# EAGLE board xambi (EAGLE 7.0.0)
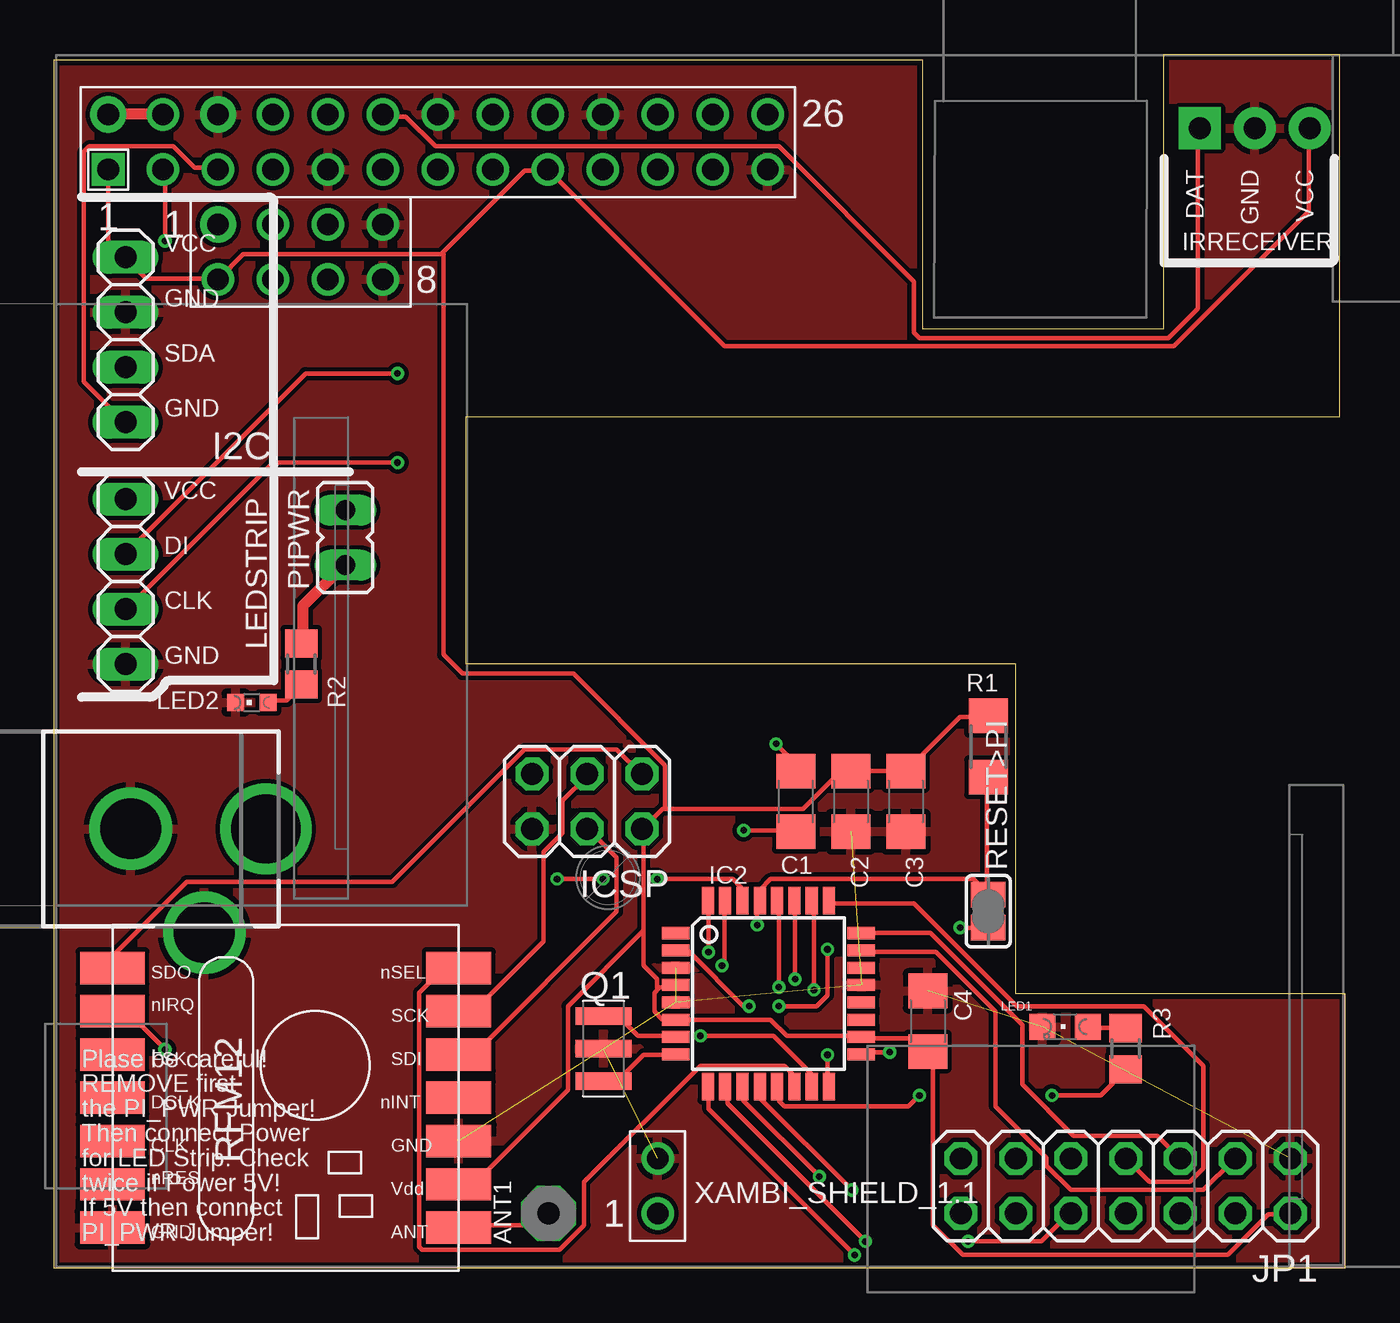
[diagram p0: board, top side]
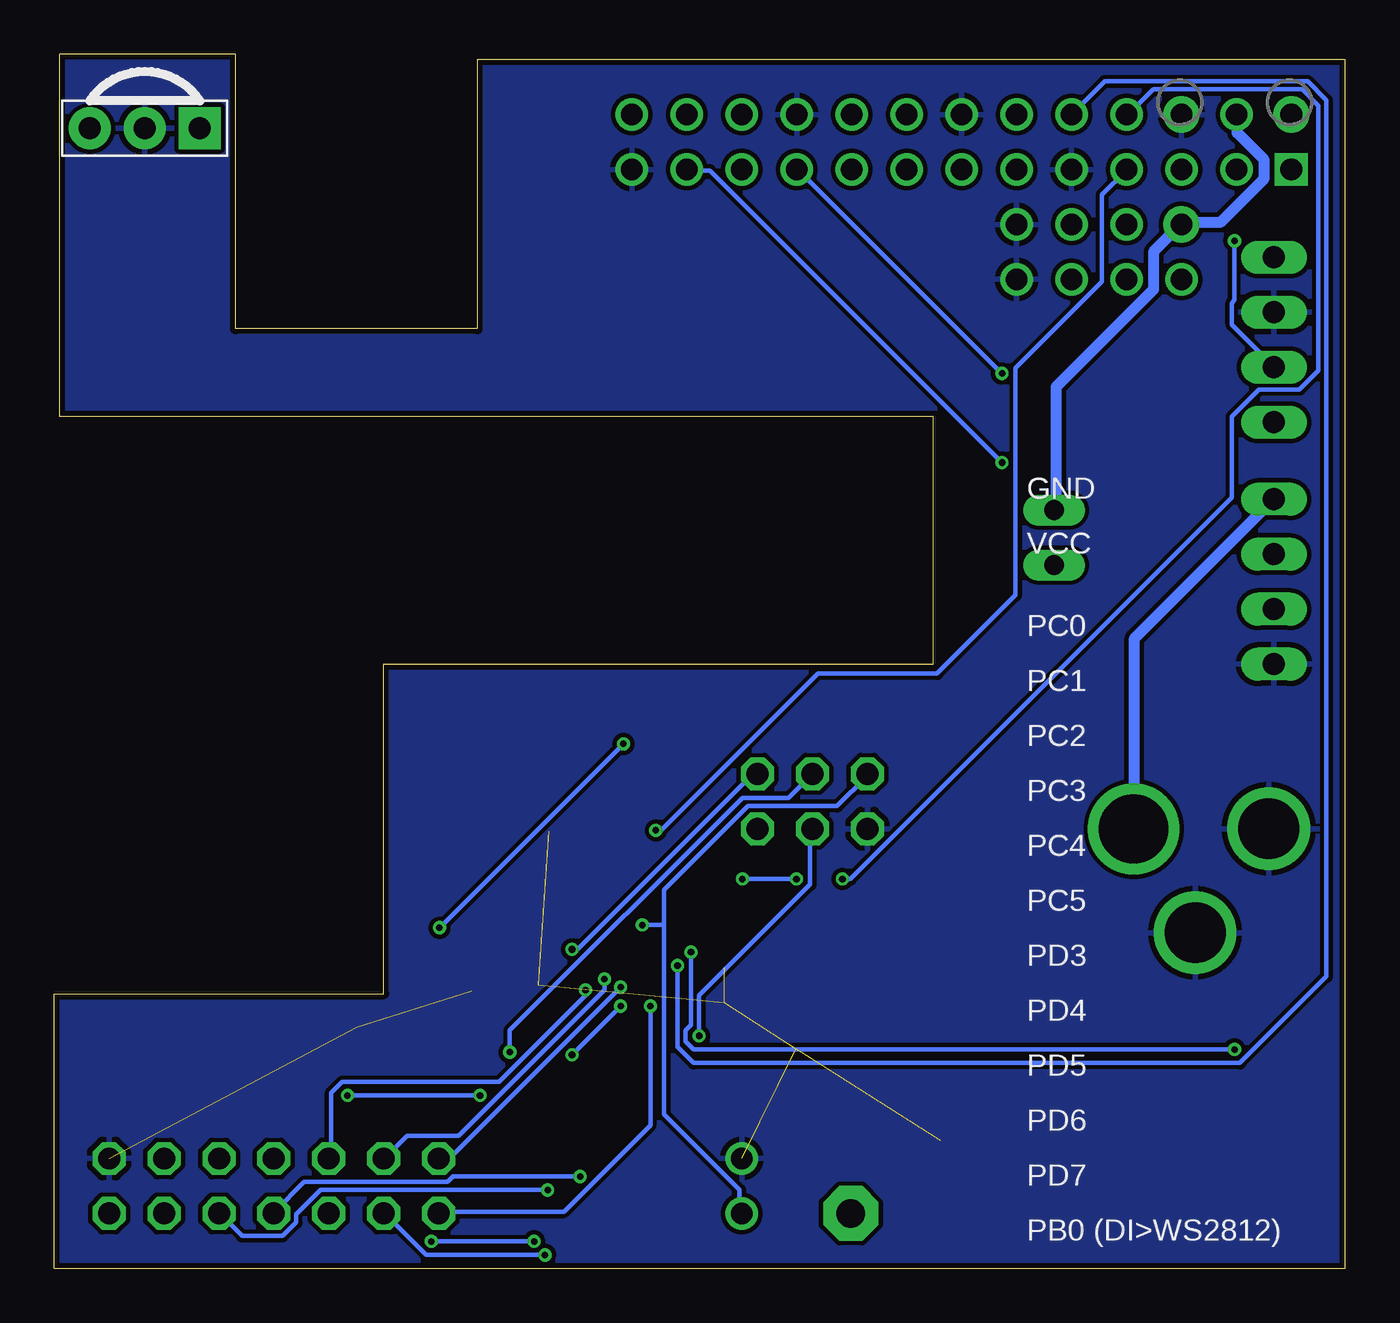
[diagram p1: board, bottom side, seen from below]

Size 59.69 x 56.13 mm. Coordinates in mm from the lower left corner, seen from the top.
Outline: 0,0 0,55.88 40.13,55.88 40.13,43.43 51.31,43.43 51.31,56.13 59.44,56.13 59.44,39.37 19.05,39.37 19.05,27.94 44.45,27.94 44.45,12.7 59.69,12.7 59.69,0 0,0
Copper layers (1*16): Top 0.035mm / dielectric 1.5mm / Bottom 0.035mm
Design rules "ITEADstudio_DRC": minimum track width 6mil, minimum drill 12mil, track to track 6mil, track to pad 6mil, pad to pad 6mil, via to via 6mil, smd to smd 0mil, copper to edge 10mil, drill to drill 10mil, minimum pad ring 10mil, minimum via ring 6mil, stop-mask expansion 2mil, vias tented up to drill 100mil, thermal gap 10mil
Net classes: 0 default: width 0.203 mm, drill 0.254 mm, clearance 0.152 mm; 1 power: width 0.508 mm, drill 0.305 mm, clearance 0.203 mm

## Footprints (pad centres in the part's own frame; a part is rotated, then mirrored left to right if it is on the bottom)
PAD-01 = drill 1.321 pad 2.54 octagon: 1 0,0
C1206 = smd 1.6 x 1.8: 1 -1.4,0; 2 1.4,0
DCJACK_2MM_PTH = drill 2.8: GND 0,7.35; GNDBREAK 4.8,10.75 | drill 3.2: PWR 0,13.6
1X04 = drill 1.016 long: 1 -3.81,0; 2 -1.27,0; 3 1.27,0; 4 3.81,0
TQFP32-08 = smd 1.27 x 0.559: 1 -4.293,2.8; 2 -4.293,2; 3 -4.293,1.2; 4 -4.293,0.4; 5 -4.293,-0.4; 6 -4.293,-1.2; 7 -4.293,-2; 8 -4.293,-2.8; 17 4.293,-2.8; 18 4.293,-2; 19 4.293,-1.2; 20 4.293,-0.4; 21 4.293,0.4; 22 4.293,1.2; 23 4.293,2; 24 4.293,2.8 | smd 0.559 x 1.27: 9 -2.8,-4.293; 10 -2,-4.293; 11 -1.2,-4.293; 12 -0.4,-4.293; 13 0.4,-4.293; 14 1.2,-4.293; 15 2,-4.293; 16 2.8,-4.293; 25 2.8,4.293; 26 2,4.293; 27 1.2,4.293; 28 0.4,4.293; 29 -0.4,4.293; 30 -1.2,4.293; 31 -2,4.293; 32 -2.8,4.293
2X03 = drill 1.016 octagon: 1 -2.54,-1.27; 2 -2.54,1.27; 3 0,-1.27; 4 0,1.27; 5 2.54,-1.27; 6 2.54,1.27
PNA460XM = drill 1.016 pad 1.93 square: 1 -2.54,0 | drill 1.016 pad 1.93: 2 0,0; 3 2.54,0
2X07 = drill 1.016 octagon: 1 -7.62,-1.27; 2 -7.62,1.27; 3 -5.08,-1.27; 4 -5.08,1.27; 5 -2.54,-1.27; 6 -2.54,1.27; 7 0,-1.27; 8 0,1.27; 9 2.54,-1.27; 10 2.54,1.27; 11 5.08,-1.27; 12 5.08,1.27; 13 7.62,-1.27; 14 7.62,1.27
CHIPLED_0805 = smd 1.2 x 1.2: A 0,-1.05; C 0,1.05
CHIPLED_0603 = smd 0.8 x 0.8: A 0,-0.75; C 0,0.75
JP1 = drill 0.914 long: 1 0,-1.27; 2 0,1.27
CSTCR6M = smd 0.8 x 2.6: 1 -1.5,0; 2 0,0; 3 1.5,0
R1206 = smd 1.6 x 1.803: 1 -1.422,0; 2 1.422,0
R0805 = smd 1.3 x 1.5: 1 -0.95,0; 2 0.95,0
SJ = smd 1.168 x 1.6: 1 -0.762,0; 2 0.762,0
RFM12 = smd 1.5 x 3: 1 -5,-10; 2 -3,-10; 3 -1,-10; 4 1,-10; 5 3,-10; 6 5,-10; 7 7,-10; 8 7,6; 9 5,6; 10 3,6; 11 1,6; 12 -1,6; 13 -3,6; 14 -5,6
RPI-B-V2 = drill 1 square: P1_1 0,0 | drill 1 pad 1.676: P1_2 0,2.54; P1_6 5.08,2.54; P5_1 5.08,-2.54 | drill 1: P1_3 2.54,0; P1_4 2.54,2.54; P1_5 5.08,0; P1_7 7.62,0; P1_8 7.62,2.54; P1_9 10.16,0; P1_10 10.16,2.54; P1_11 12.7,0; P1_12 12.7,2.54; P1_13 15.24,0; P1_14 15.24,2.54; P1_15 17.78,0; P1_16 17.78,2.54; P1_17 20.32,0; P1_18 20.32,2.54; P1_19 22.86,0; P1_20 22.86,2.54; P1_21 25.4,0; P1_22 25.4,2.54; P1_23 27.94,0; P1_24 27.94,2.54; P1_25 30.48,0; P1_26 30.48,2.54; P5_2 5.08,-5.08; P5_3 7.62,-2.54; P5_4 7.62,-5.08; P5_5 10.16,-2.54; P5_6 10.16,-5.08; P5_7 12.7,-2.54; P5_8 12.7,-5.08; P6_1 25.4,-48.26; P6_2 25.4,-45.72

## Placement (x,y rotation side)
ANT1  [PAD-01]  22.86,2.54 0 top
C1  100n  [C1206]  34.29,21.59 90 top
C2  100n  [C1206]  36.83,21.59 270 top
C3  4.7ÂµF  [C1206]  39.37,21.59 270 top
C4  4,7ÂµF  [C1206]  40.39,11.43 270 top
CN1  LEDPower 5v/12V  [DCJACK_2MM_PTH]  -3.81,20.32 270 top
I2C  [1X04]  3.3,42.93 90 top
IC2  MEGA368  [TQFP32-08]  33.02,12.7 0 top
ICSP  [2X03]  24.64,21.59 180 top
IRRECEIVER  PNA460XM  [PNA460XM]  55.5,52.7 180 bottom
JP1  [2X07]  49.53,3.81 180 top
LED1  PB1  [CHIPLED_0805]  46.74,11.18 90 top
LED2  red  [CHIPLED_0603]  9.14,26.16 90 top
LEDSTRIP  [1X04]  3.3,31.75 270 top
PIPWR  [JP1]  13.46,33.78 180 top
Q1  16MHz  [CSTCR6M]  25.4,10.16 270 top
R1  10k  [R1206]  43.18,24.13 90 top
R2  680R  [R0805]  11.43,27.94 90 top
R3  680  [R0805]  49.53,10.16 270 top
RESET>PI  [SJ]  43.18,16.51 90 top
U$1  RFM12_SMDSMD  [RFM12]  12.7,8.89 270 top
XAMBI_SHIELD_1.1  XPIX Development / 2014  [RPI-B-V2]  2.5,50.8 0 top

## Library data of the parts
ANT1 = discrete
C1-C4 R1-R3 = rcl
CN1 IRRECEIVER LED1 LED2 = _adafruit
I2C ICSP JP1 LEDSTRIP = pinhead
IC2 = avr-7
PIPWR RESET>PI = jumper
Q1 = murata-filter; MPN: CSTCR6M00G53-R0; OC_FARNELL: 1170434; OC_NEWARK: 25M8759
U$1 = rfm_12
XAMBI_SHIELD_1.1 = raspberry

## Nets
+3V3: C2.1 C3.1 C4.2 I2C.4 IC2.4 IC2.6 IC2.18 ICSP.2 IRRECEIVER.3 JP1.2 R1.2 U$1.9 XAMBI_SHIELD_1.1.P1_1 XAMBI_SHIELD_1.1.P1_17 XAMBI_SHIELD_1.1.P5_2
+5V [power]: PIPWR.2 R2.2
+12V [power]: CN1.PWR LEDSTRIP.1
_RESET: C1.1 XAMBI_SHIELD_1.1.P1_7
ANTENNA: ANT1.1 U$1.8
CLK: LEDSTRIP.3 XAMBI_SHIELD_1.1.P1_23
DI: LEDSTRIP.2 XAMBI_SHIELD_1.1.P1_19
GND [power]: C2.2 C3.2 C4.1 CN1.GND CN1.GNDBREAK I2C.3 IC2.3 IC2.5 IC2.21 ICSP.6 IRRECEIVER.2 JP1.1 LED1.C LED2.C LEDSTRIP.4 Q1.2 U$1.7 U$1.10 XAMBI_SHIELD_1.1.P1_6 XAMBI_SHIELD_1.1.P1_9 XAMBI_SHIELD_1.1.P1_14 XAMBI_SHIELD_1.1.P1_20 XAMBI_SHIELD_1.1.P1_25 XAMBI_SHIELD_1.1.P5_7 XAMBI_SHIELD_1.1.P5_8 XAMBI_SHIELD_1.1.P6_2
GPIO30: XAMBI_SHIELD_1.1.P5_5
GPIO31: XAMBI_SHIELD_1.1.P5_6
I2C0_SCL/GPIO29: XAMBI_SHIELD_1.1.P5_4
I2C0_SDA/GPIO28: XAMBI_SHIELD_1.1.P5_3
IRINPUT: IRRECEIVER.1 XAMBI_SHIELD_1.1.P1_12
IRQ: IC2.32 U$1.2
MISO: IC2.16 ICSP.1 U$1.1
MOSI: IC2.15 ICSP.4 U$1.12
N$1: C1.2 RESET>PI.1
N$2: IC2.7 Q1.1
N$3 [power]: PIPWR.1 XAMBI_SHIELD_1.1.P1_2 XAMBI_SHIELD_1.1.P1_4 XAMBI_SHIELD_1.1.P5_1
N$4: IC2.8 Q1.3
N$7: LED2.A R2.1
N$19: LED1.A R3.1
N$20: IC2.13 R3.2
PB0: IC2.12 JP1.6
PC0: IC2.23 JP1.3
PC1: IC2.24 JP1.5
PC2: IC2.25 JP1.7
PC3: IC2.26 JP1.9
PC4: IC2.27 JP1.11
PC5: IC2.28 JP1.13
PD3: IC2.1
PD4: IC2.2 JP1.14
PD5: IC2.9 JP1.12
PD6: IC2.10 JP1.10
PD7: IC2.11 JP1.8
RESET: IC2.29 ICSP.5 R1.1 RESET>PI.2 XAMBI_SHIELD_1.1.P6_1
RX: IC2.30 XAMBI_SHIELD_1.1.P1_8
SCK: IC2.17 ICSP.3 U$1.13
SCL: I2C.1 XAMBI_SHIELD_1.1.P1_5
SDA: I2C.2 XAMBI_SHIELD_1.1.P1_3
SEL: IC2.14 U$1.14
TX: IC2.31 XAMBI_SHIELD_1.1.P1_10

## Tracks (layer width: path | path; a pad name or v marks a point on that pad's centre or on a via)
+3V3
  Top 0.203: R1.2 43.12,25.5 41.88,25.5 C3.1 39.25,23 36.88,23 C2.1 36.75,22.88 36.25,22.88 34.62,21.25 28.25,21.25 | 27.94,12.94 28,13 28.62,13 IC2.4 | 27.94,12.94 27.75,12.75 27.75,11.88 28.12,11.5 IC2.6 33.12,11.5 33.88,10.75 37.25,10.75 IC2.18 37.38,10.62 39.88,10.62 40.38,10.12 C4.2 40.5,10 40.62,9.88 40.62,2 42,0.62 54.25,0.62 56.12,2.5 57.12,2.5 JP1.2 | 27.25,15.62 27.25,20.25 ICSP.2 27.25,20.38 28.12,21.25 28.25,21.25 | 27.25,15.62 27.25,14 27.88,13.38 27.88,13 27.94,12.94 | 27.25,15.62 23.75,12.12 23.75,8.25 19.5,4 18.75,4 U$1.9 | 22.88,50.88 XAMBI_SHIELD_1.1.P1_17 | 2.5,50.88 XAMBI_SHIELD_1.1.P1_1 2.5,47.5 3.25,46.75 I2C.4 3.38,46.62 4.25,45.75 7.5,45.75 XAMBI_SHIELD_1.1.P5_2 7.62,45.75 8.75,46.88 17.88,46.88 17.94,46.94 | 17.94,46.94 21.75,50.75 22.75,50.75 XAMBI_SHIELD_1.1.P1_17 | IRRECEIVER.3 58,52.62 58,48.88 51.75,42.62 31,42.62 22.88,50.75 XAMBI_SHIELD_1.1.P1_17 | 28.25,21.25 28.25,23.25 24,27.5 18.88,27.5 18,28.38 18,46.88 17.94,46.94
+5V
  Top 0.508: R2.2 11.5,29 11.5,30.62 13.38,32.5 PIPWR.2
+12V
  Bottom 0.508: LEDSTRIP.1 3.38,35.5 9.75,29.12 9.75,20.38 CN1.PWR
_RESET  (via drill 0.3)
  Top 0.203: v31.88,20.25 34.25,20.25 C1.1
  Bottom 0.203: v31.88,20.25 31.62,20.25 24.38,27.5 18.88,27.5 15.25,31.12 15.25,41.62 11.25,45.62 11.25,49.62 10.12,50.75 XAMBI_SHIELD_1.1.P1_7
ANTENNA
  Top 0.203: U$1.8 18.75,2 22.25,2 22.75,2.5 ANT1.1
CLK  (via drill 0.3)
  Top 0.203: v15.88,37.25 10.12,37.25 3.38,30.5 LEDSTRIP.3
  Bottom 0.203: v15.88,37.25 29.38,50.75 30.38,50.75 XAMBI_SHIELD_1.1.P1_23
DI  (via drill 0.3)
  Top 0.203: v15.88,41.38 11.62,41.38 3.38,33.12 LEDSTRIP.2
  Bottom 0.203: v15.88,41.38 25.25,50.75 XAMBI_SHIELD_1.1.P1_19
GND  (8 unrouted)
  pour Top: 0,0 0,55.88 59.69,55.88 59.69,0
  pour Bottom: 0,0 0,55.88 59.69,55.88 59.69,0
IRINPUT
  Top 0.203: XAMBI_SHIELD_1.1.P1_12 15.25,53.25 16.25,53.25 17.62,51.88 33.5,51.88 39.75,45.62 39.75,43.25 40,43 51.5,43 52.88,44.38 52.88,52.62 IRRECEIVER.1
IRQ  (via drill 0.3)
  Top 0.203: v30.25,14.62 30.25,16.88 IC2.32 | v5.12,10.12 3.38,11.88 2.75,11.88 U$1.2
  Bottom 0.203: v30.25,14.62 30.25,11.25 30.5,11 30.5,10.5 30.12,10.12 v5.12,10.12
MISO  (via drill 0.3)
  Top 0.203: v35.75,9.88 35.75,8.5 IC2.16 | v33.5,12.12 35.25,12.12 35.75,12.62 v35.75,14.75 | U$1.1 2.75,14 2.75,14.5 6.12,17.88 15.62,17.88 21.75,24 26,24 27.12,22.88 ICSP.1
  Bottom 0.203: v33.5,12.12 v35.75,9.88 | v35.75,14.75 35.5,14.75 27.5,22.75 27.25,22.75 ICSP.1
MOSI  (via drill 0.3)
  Top 0.203: v29.88,10.75 33.25,10.75 35,9 35,8.5 IC2.15 | U$1.12 18.75,10 19.5,10 26,16.5 26,19 24.75,20.25 ICSP.4
  Bottom 0.203: v29.88,10.75 29.88,12.62 24.75,17.75 24.75,20.25 ICSP.4
N$1  (via drill 0.3)
  Top 0.203: v41.88,15.75 43.12,15.75 RESET>PI.1 | v33.38,24.25 34.38,23.25 34.38,23 C1.2
  Bottom 0.203: v33.38,24.25 v41.88,15.75
N$2
  Top 0.203: IC2.7 28.62,10.75 27,10.75 26.12,11.62 25.5,11.62 Q1.1
N$3
  Top 0.508: XAMBI_SHIELD_1.1.P1_4 5,53.38 2.5,53.38 XAMBI_SHIELD_1.1.P1_2
  Bottom 0.508: PIPWR.1 13.38,35.12 13.38,40.75 8.88,45.25 8.88,47 7.62,48.25 XAMBI_SHIELD_1.1.P5_1 7.38,48.38 5.75,48.38 3.75,50.38 3.75,51.25 5,52.5 5,53.25 XAMBI_SHIELD_1.1.P1_4
N$4
  Top 0.203: IC2.8 28.62,9.88 27.25,9.88 26.12,8.75 25.5,8.75 Q1.3
N$7
  Top 0.203: LED2.A 10,26.25 10.75,26.25 11.38,26.88 R2.1
N$19
  Top 0.203: LED1.A 47.88,11.12 49.5,11.12 R3.1
N$20  (via drill 0.3)
  Top 0.203: v40,8 39.5,7.5 33.75,7.5 33.5,7.75 33.5,8.38 IC2.13 | v46.12,8 48.38,8 49.5,9.12 R3.2
  Bottom 0.203: v46.12,8 v40,8
PB0  (via drill 0.3)
  Top 0.203: v36.88,3.62 32.62,7.88 32.62,8.38 IC2.12
  Bottom 0.203: v36.88,3.62 47.38,3.62 48.5,2.5 48.5,2.12 49.12,1.5 51,1.5 52,2.5 JP1.6
PC0
  Top 0.203: IC2.23 37.38,14.62 40.75,14.62 43.5,11.88 43.5,7.5 45.88,5.12 45.88,4.75 47,3.62 53.12,3.62 54.5,5 JP1.3
PC1
  Top 0.203: IC2.24 40.5,15.5 44.75,11.25 44.75,8.5 47.12,6.12 51,6.12 52,5.12 JP1.5
PC2
  Top 0.203: IC2.25 35.88,16.88 39.75,16.88 44.5,12.12 50.38,12.12 53.12,9.38 53.12,4.62 52.5,4 50.62,4 49.62,5 JP1.7
PC3  (via drill 0.3)
  Top 0.203: v35.12,12.88 35.12,16.88 IC2.26
  Bottom 0.203: v35.12,12.88 35.12,12.62 39.12,8.62 46.38,8.62 46.88,8.12 46.88,5.12 JP1.9
PC4  (via drill 0.3)
  Top 0.203: v34.25,13.38 34.25,16.88 IC2.27
  Bottom 0.203: v34.25,13.38 34.25,12.88 41,6.12 43.38,6.12 44.38,5.12 JP1.11
PC5  (via drill 0.3)
  Top 0.203: v33.5,13 33.5,16.88 IC2.28
  Bottom 0.203: v33.5,13 41.38,5.12 41.88,5.12 JP1.13
PD4  (via drill 0.3)
  Top 0.203: v32.12,12.12 31.88,12.12 29.38,14.62 28.75,14.62 IC2.2
  Bottom 0.203: v32.12,12.12 32.12,6.62 36.12,2.62 41.88,2.62 JP1.14
PD5  (via drill 0.3)
  Top 0.203: v37,0.62 30.25,7.38 30.25,8.38 IC2.9
  Bottom 0.203: v37,0.62 42.5,0.62 44.38,2.5 JP1.12
PD6  (via drill 0.3)
  Top 0.203: v37.5,1.25 31.12,7.62 31.12,8.38 IC2.10 | v42.25,1.25 45.62,1.25 46.88,2.5 JP1.10
  Bottom 0.203: v42.25,1.25 v37.5,1.25
PD7  (via drill 0.3)
  Top 0.203: v35.38,4.25 31.88,7.75 31.88,8.38 IC2.11
  Bottom 0.203: v35.38,4.25 41.25,4.25 41.5,4 48.12,4 49.5,2.62 JP1.8
RESET  (via drill 0.3)
  Top 0.203: R1.1 43.12,22.62 43.12,17.5 RESET>PI.2 43.12,17.38 42.5,18 33.12,18 32.62,17.5 IC2.29 32.5,16.88 v32.5,15.88
  Bottom 0.203: 31.5,15.88 31.5,17.5 27.62,21.38 23.5,21.38 22.12,22.75 ICSP.5 | 31.5,15.88 31.5,7.12 28,3.62 28,2.62 XAMBI_SHIELD_1.1.P6_1 | 31.5,15.88 v32.5,15.88
RX  (via drill 0.3)
  Top 0.203: v27.88,18 31.38,18 31.75,17.62 31.75,17 IC2.30 | v23.25,18 v25.38,18
  Bottom 0.203: v25.38,18 v27.88,18 | v23.25,18 22.88,18 5.25,35.62 5.25,39.38 4,40.62 2.12,40.62 1.25,41.5 1.25,53.75 2,54.5 8.88,54.5 10,53.38 XAMBI_SHIELD_1.1.P1_8
SCK  (via drill 0.3)
  Top 0.203: v38.62,10 37.38,10 IC2.17 | U$1.13 18.75,12 19.5,12 22.62,15.12 22.62,19.25 23.5,20.12 23.5,21.62 24.62,22.75 ICSP.3
  Bottom 0.203: v38.62,10 38.62,11 27.88,21.75 25.75,21.75 24.75,22.75 ICSP.3
SCL
  Top 0.203: XAMBI_SHIELD_1.1.P1_5 7.5,50.88 6.5,50.88 5.5,51.88 1.62,51.88 1.38,51.62 1.38,41 3.25,39.12 I2C.1
SDA  (via drill 0.3)
  Top 0.203: v5.12,47.5 5.12,50.75 XAMBI_SHIELD_1.1.P1_3
  Bottom 0.203: v5.12,47.5 5.12,44.75 5.25,44.62 5.25,43.62 3.38,41.75 I2C.2
SEL
  Top 0.203: IC2.14 34.12,8.5 34.12,9 33.75,9.38 29.88,9.38 24.5,4 24.5,2 23.38,0.88 17,0.88 16.88,1 16.88,12.75 18,13.88 18.62,13.88 U$1.14
TX  (via drill 0.3)
  Top 0.203: v30.88,14 31,14.12 31,16.88 IC2.31
  Bottom 0.203: v30.88,14 30.88,10.25 30.12,9.5 4.88,9.5 0.88,13.5 0.88,54 1.75,54.88 11.12,54.88 XAMBI_SHIELD_1.1.P1_10

## Text on the board
tNames: DAT | GND | VCC | VCC | GND | SDA | GND | VCC | DI | CLK | GND | Plase be careful! / REMOVE first / the PI_PWR Jumper! / Then connect Power / for LED Strip. Check / twice if Power 5V! / If 5V then connect / PI_PWR Jumper!
bNames: GND | VCC | PC0 | PC1 | PC2 | PC3 | PC4 | PC5 | PD3 | PD4 | PD5 | PD6 | PD7 | PB0 (DI>WS2812)